# Altium PCB 5x5LED_REV_A.PcbDoc
Units mm, origin at the board's own origin, x right, y up, seen from the top; angles counter-clockwise.
Board outline 63 x 41 mm, 4 copper layers (Top Layer, L2 (GND), L3 (GND), Bottom Layer), stack 1.369 mm thick; 49 components, 29 nets, 153 pads, 48 vias.
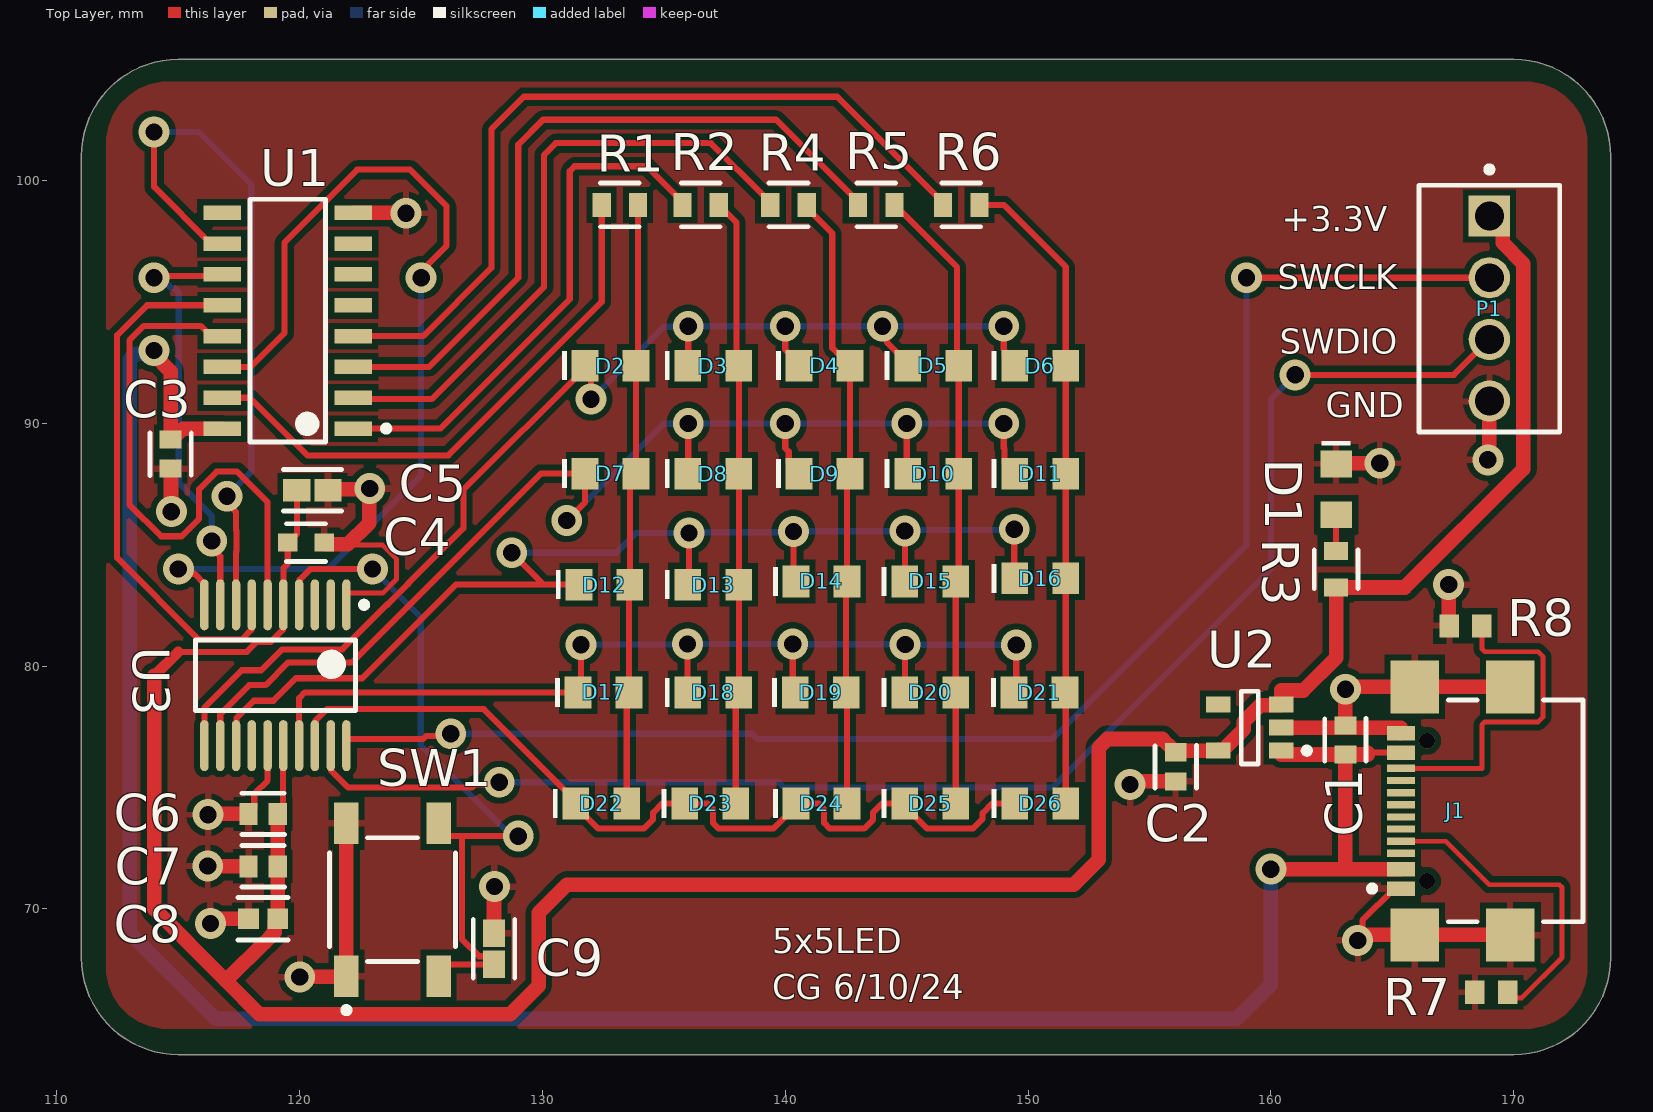
[diagram p0: Top Layer view]
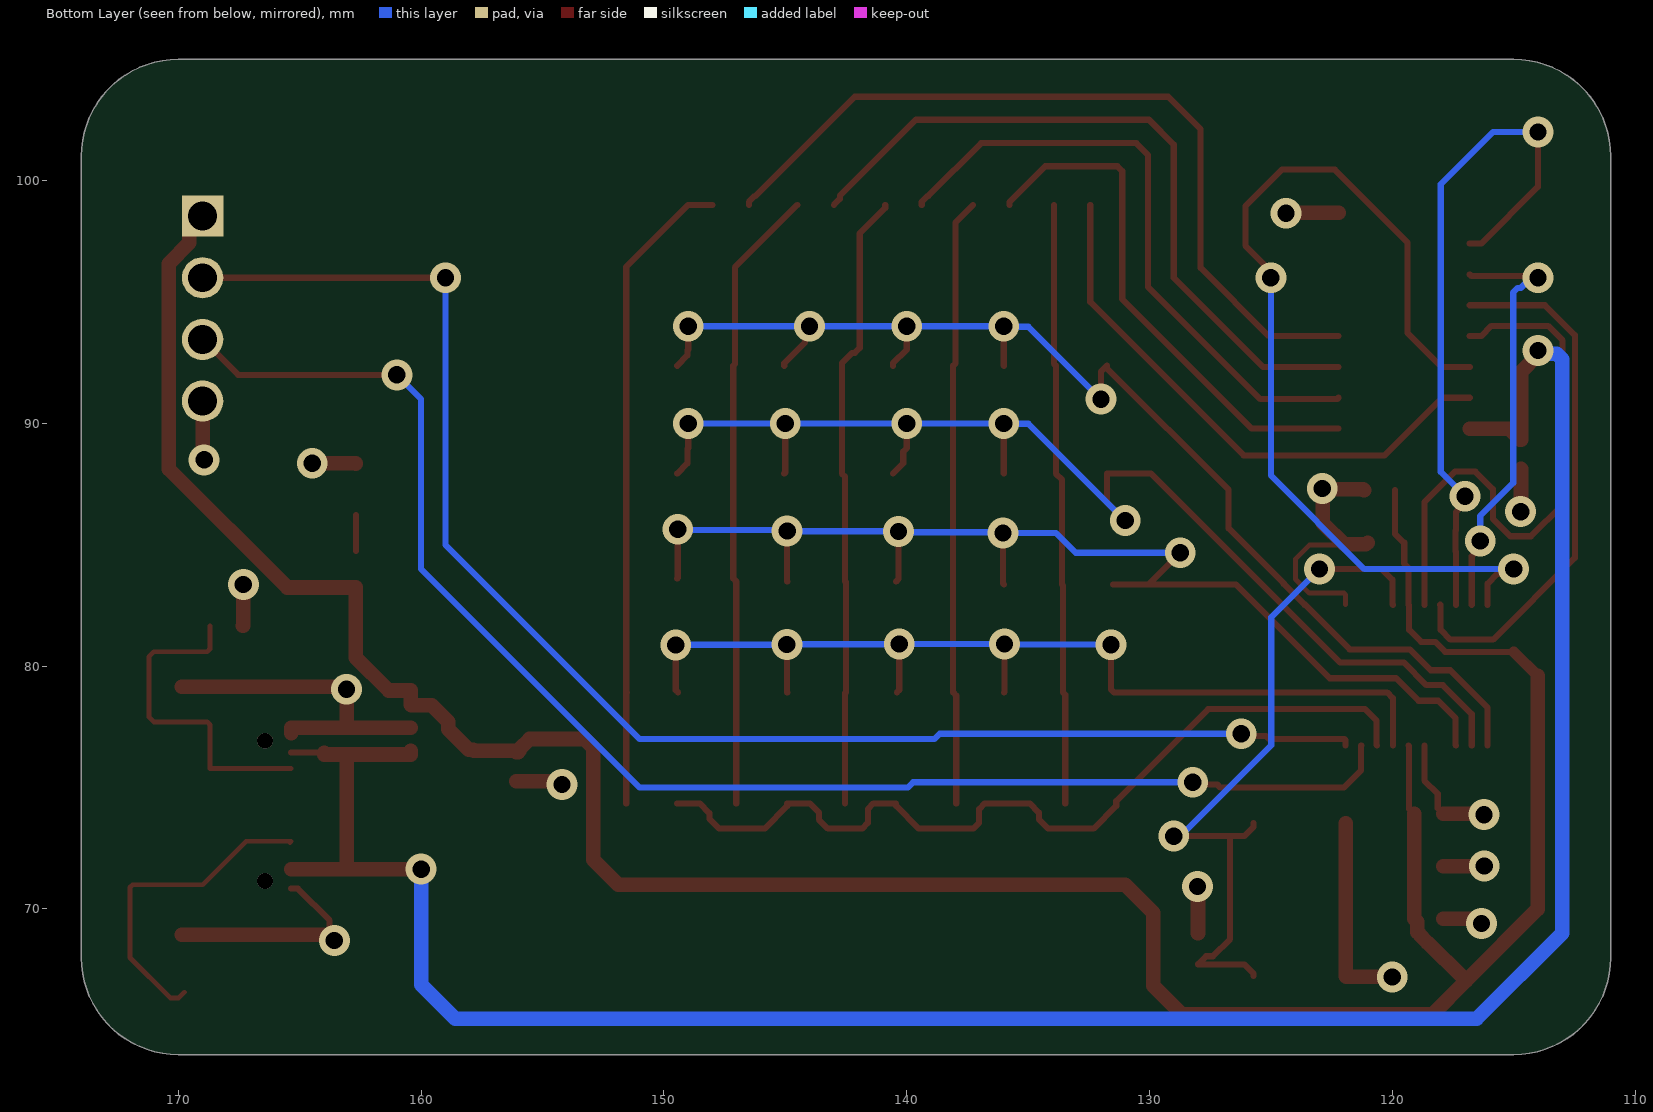
[diagram p1: Bottom Layer view, seen from below]
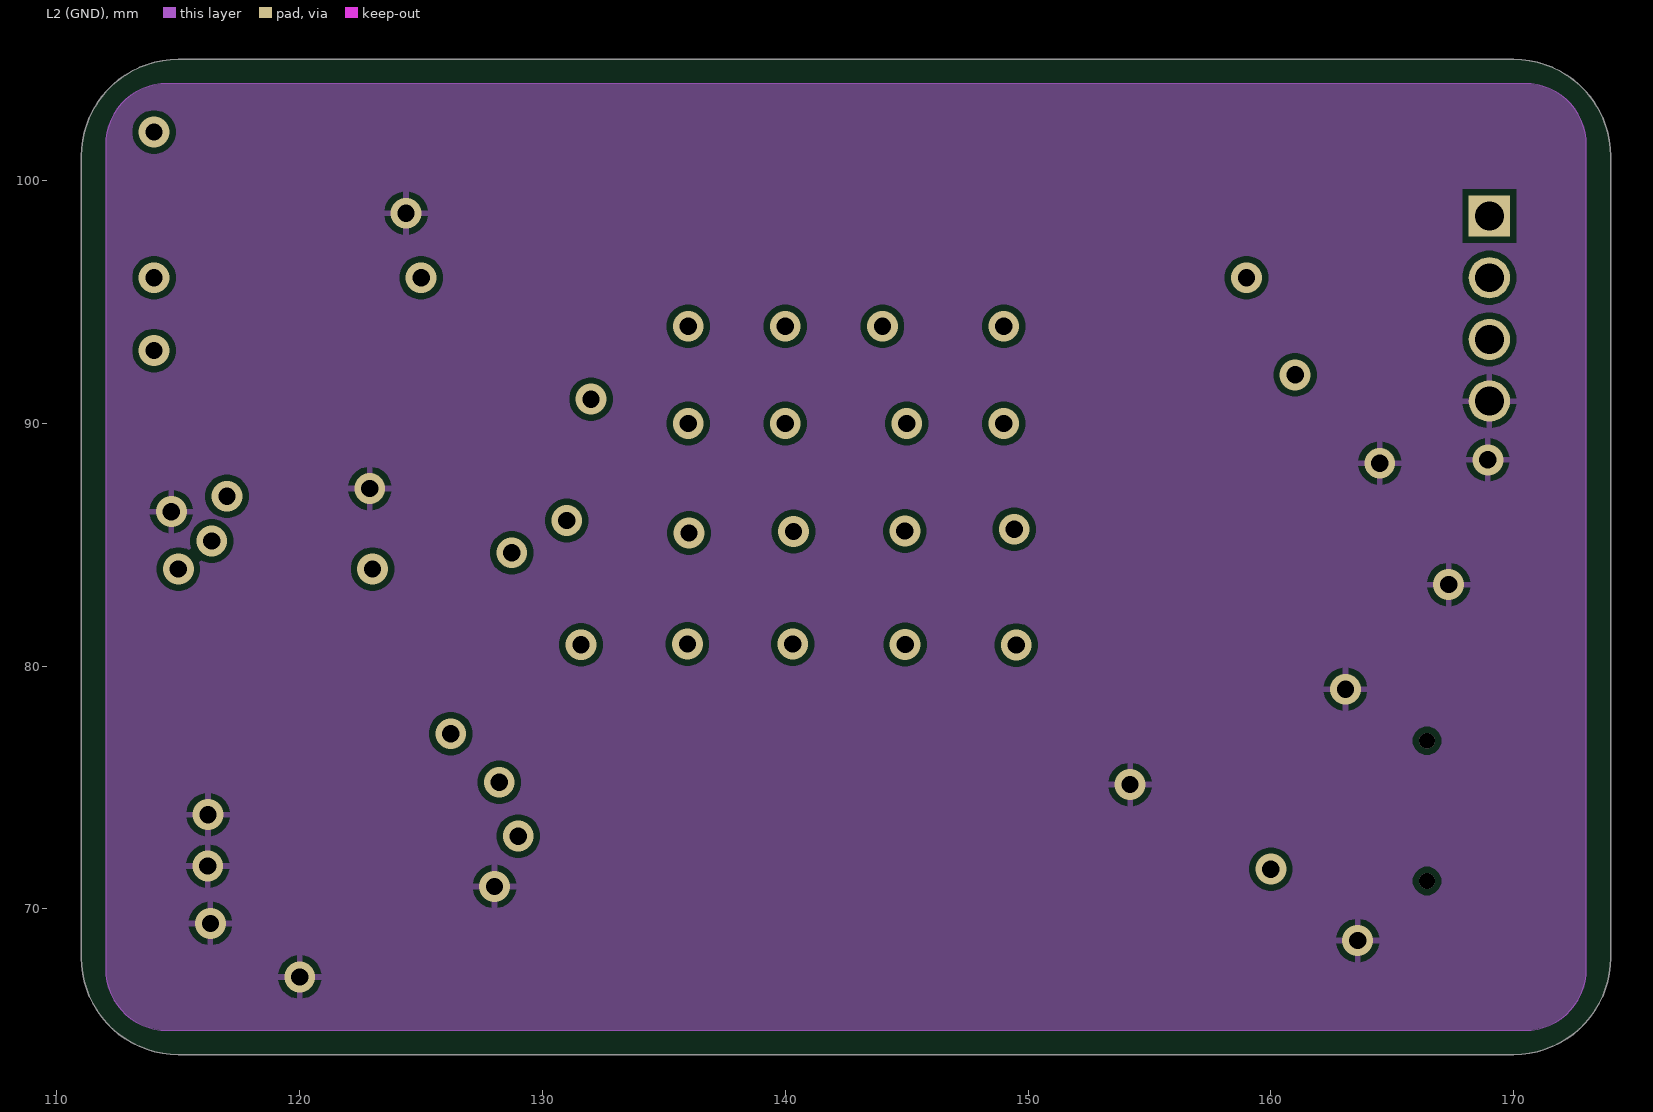
[diagram p2: L2 (GND)]
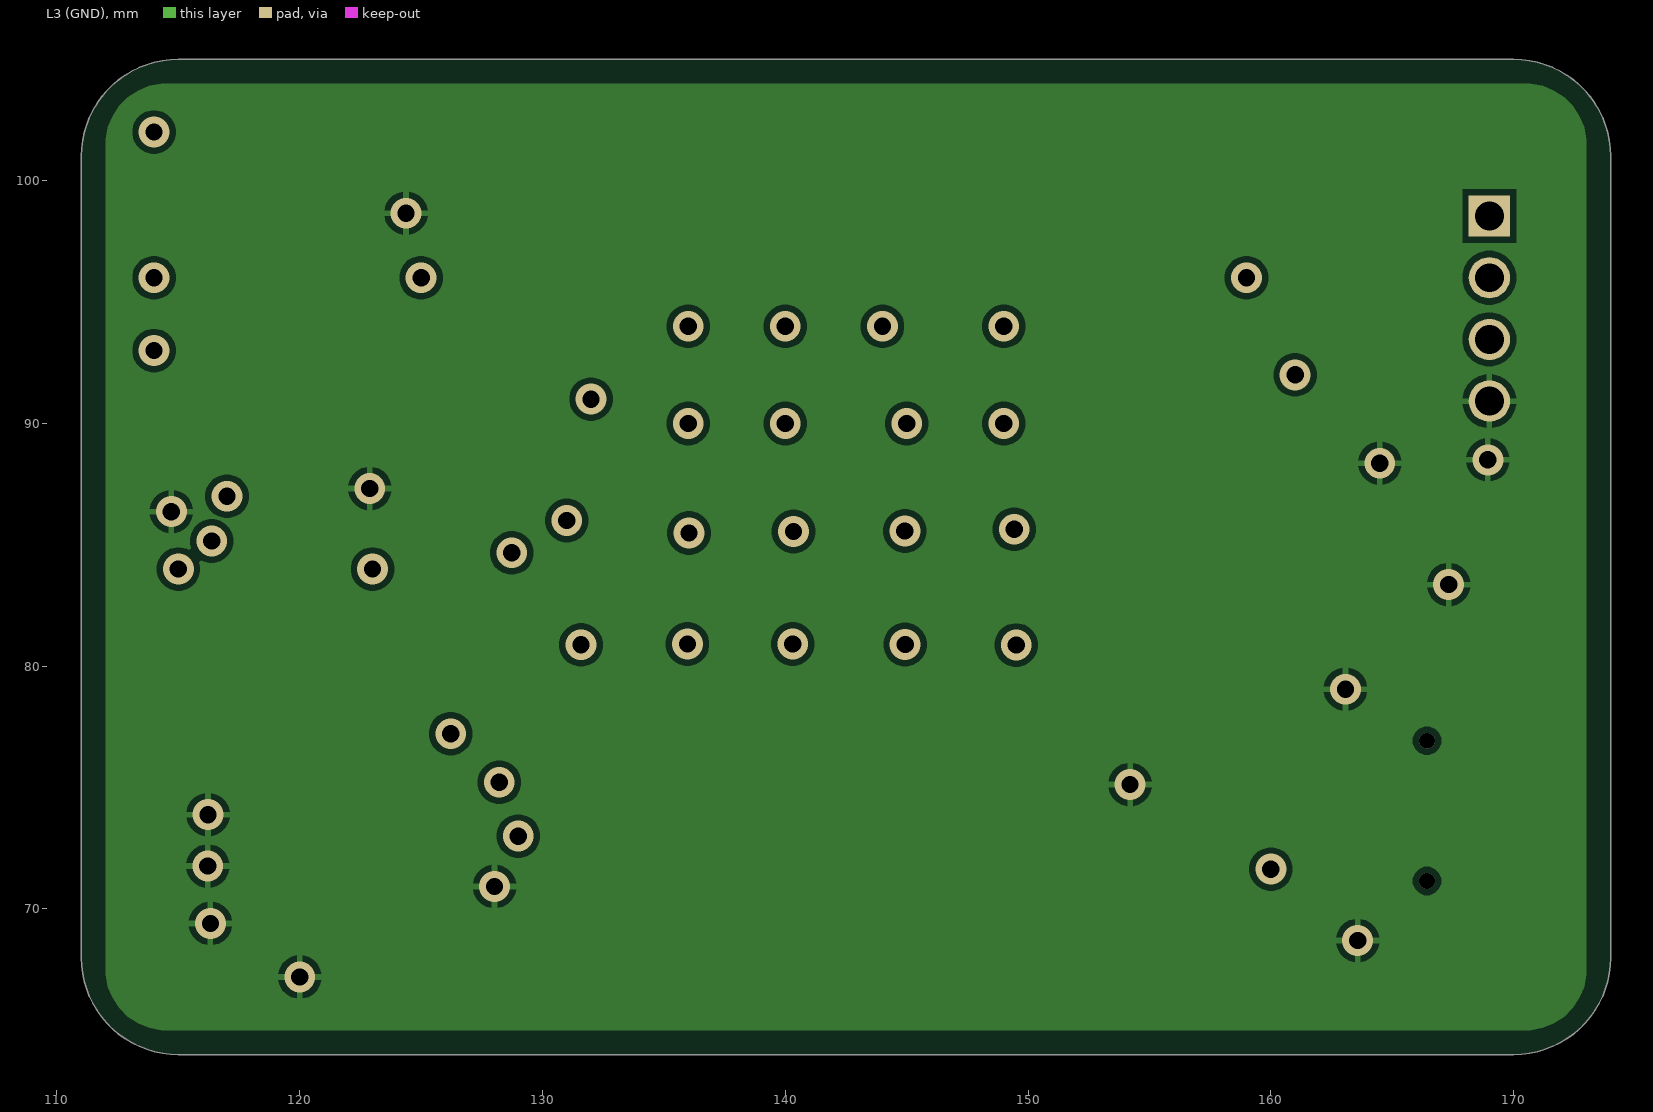
[diagram p3: L3 (GND)]
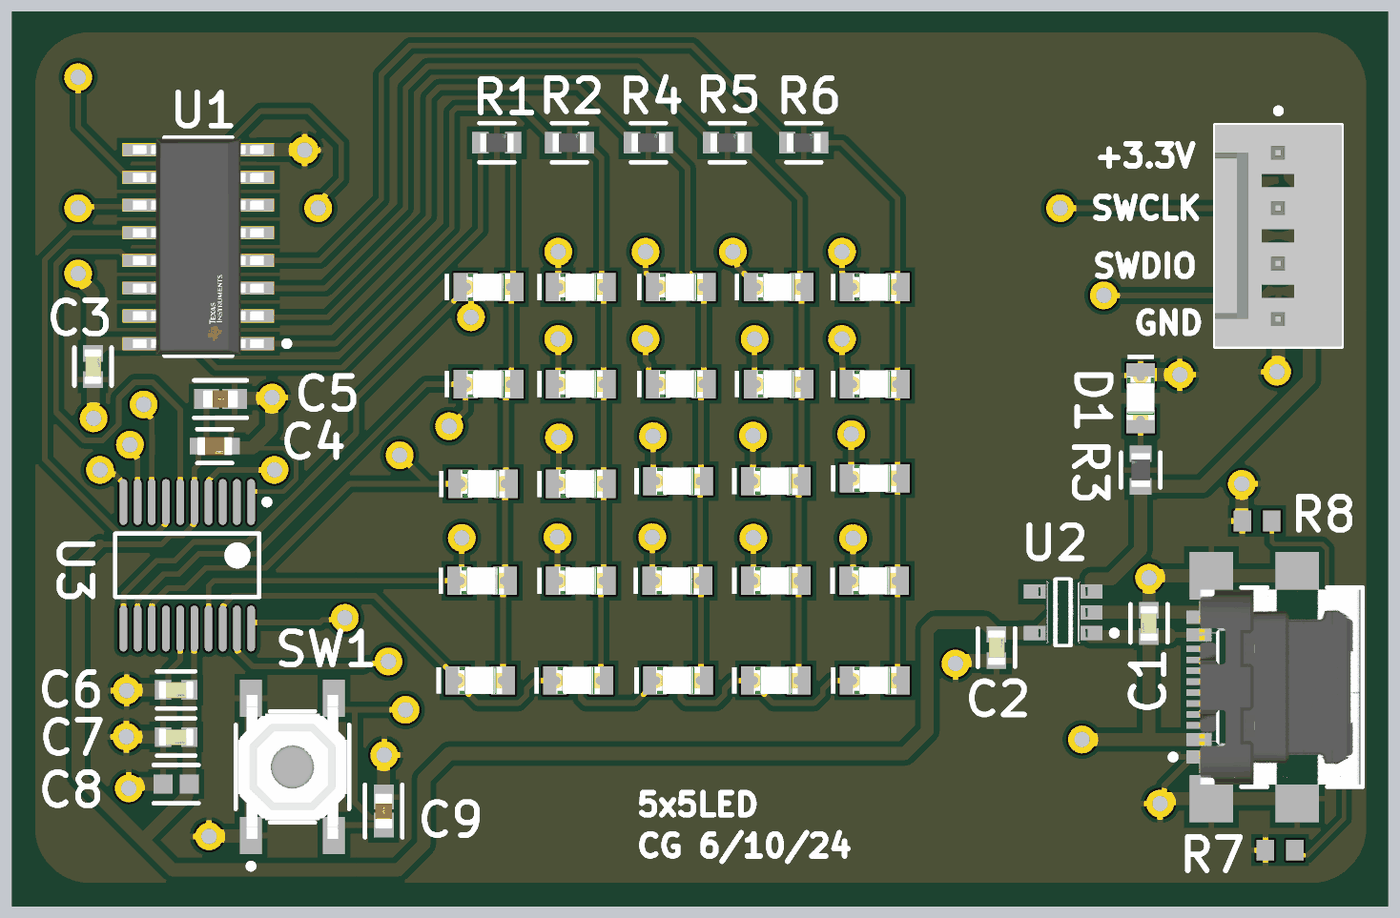
[diagram p4: 3D render of the assembled board from above, using the file's embedded part models]

## Layer stack, top to bottom
Top Solder: solder mask 0.0254, SM-001, Dk 4
Top Layer: signal copper 0.035
Dielectric 1: prepreg 0.1295, PP-017, Dk 4.3
Dielectric 2: prepreg 0.1295, PP-017, Dk 4.3
L2 (GND): signal copper 0.035
Dielectric 3: core 0.7112, Core-039, Dk 4.8
L3 (GND): signal copper 0.035
Dielectric 4: prepreg 0.1295, PP-017, Dk 4.3
Dielectric 5: prepreg 0.1295, PP-017, Dk 4.3
Bottom Layer: signal copper 0.035
Bottom Solder: solder mask 0.0254, SM-001, Dk 4

## Board outline
111,68 111,101 cw(c115,101) 115,105 170,105 cw(c170,101) 174,101 174,68 cw(c170,68) 170,64 115,64 cw(c115,68)

## Design rules (kind name [scope] priority, off if disabled: settings)
Clearance Clearance_1 [(ExistsOnLayer('L2 (GND)') Or ExistsOnLayer('L3 (GND)')) vs (ExistsOnLayer('L2 (GND)') Or ExistsOnLayer('L3 (GND)'))] p1: gap=0.254 ignorepadtopadclearanceinfootprint=FALSE sourcerule=37 cellrowname=All cellrowtype=0 cellcolname=All cellcoltype=0 innerlayers=TRUE
Clearance Clearance_2 [(ExistsOnLayer('Top Layer') Or ExistsOnLayer('Bottom Layer')) vs (ExistsOnLayer('Top Layer') Or ExistsOnLayer('Bottom Layer'))] p2: gap=0.254 ignorepadtopadclearanceinfootprint=FALSE sourcerule=37 cellrowname=All cellrowtype=0 cellcolname=All cellcoltype=0 outerlayers=TRUE
Clearance [All] p3: gap=0.254 ignorepadtopadclearanceinfootprint=FALSE ismatrix=TRUE
PolygonConnect [All] p1: connectstyle=Relief reliefconductorwidth=0.254 reliefentries=4 polygonreliefangle="90 Angle" airgapwidth=0.254
RoutingVias [All] p1: holewidth=0.711 width=1.27 viastyle="Through Hole" minholewidth=0.711 minwidth=1.27 maxholewidth=0.711 maxwidth=1.27
SolderMaskExpansion [All] p1: expansion=0.102 istentingtop=FALSE
UnRoutedNet [All] p1: checkbadconnections=TRUE
Width MaxMinWidth_1 [All] p1: maxlimit=0.6 minlimit=0.2 preferedwidth=0.254 minimp=50.000000 maximp=50.000000 favimp=50.000000
Width [All] p2: maxlimit=0.254 minlimit=0.254 preferedwidth=0.254
29 further rules are at their usual default settings.

## Components (designator, comment, footprint, x,y, rotation, side; value= is the part's Value field where it differs from the comment)
C1 "100n" FP-C0603C-CF-MFG 163.068,76.962 r90 top value="0.10 μF"
C2 "100n" FP-C0603C-CF-MFG 156.083,75.854 r270 top value="0.10 μF"
C3 "100n" FP-C0603C-CF-MFG 114.681,88.738 r270 top value="0.10 μF"
C4 "10n" FP-0603-L_1_6_0_15-W_0_81-MFG 120.257,85.09 r0 top
C5 "1u" FP-C1608-080-0_1-IPC_B 120.523,87.249 r180 top
C6 "100n" FP-C0603C-CF-MFG 118.491,73.914 r180 top value="0.10 μF"
C7 "100n" FP-C0603C-CF-MFG 118.491,71.755 r180 top value="0.10 μF"
C8 "4u7" FP-GRM188-0_15-IPC_C 118.491,69.596 r180 top
C9 "1u" FP-C1608-080-0_1-IPC_B 128,68.359 r270 top
D1 "150080RS75000" WL-SMCW_0805_150080xx75000 162.687,87.283 r270 top
D2 "150080RS75000" WL-SMCW_0805_150080xx75000 132.802,92.379 r0 top
D3 "150080RS75000" WL-SMCW_0805_150080xx75000 137.036,92.379 r0 top
D4 "150080RS75000" WL-SMCW_0805_150080xx75000 141.616,92.379 r0 top
D5 "150080RS75000" WL-SMCW_0805_150080xx75000 146.096,92.379 r0 top
D6 "150080RS75000" WL-SMCW_0805_150080xx75000 150.503,92.379 r0 top
D7 "150080RS75000" WL-SMCW_0805_150080xx75000 132.802,87.934 r0 top
D8 "150080RS75000" WL-SMCW_0805_150080xx75000 137.036,87.934 r0 top
D9 "150080RS75000" WL-SMCW_0805_150080xx75000 141.616,87.934 r0 top
D10 "150080RS75000" WL-SMCW_0805_150080xx75000 146.096,87.934 r0 top
D11 "150080RS75000" WL-SMCW_0805_150080xx75000 150.503,87.934 r0 top
D12 "150080RS75000" WL-SMCW_0805_150080xx75000 132.548,83.362 r0 top
D13 "150080RS75000" WL-SMCW_0805_150080xx75000 137.036,83.362 r0 top
D14 "150080RS75000" WL-SMCW_0805_150080xx75000 141.489,83.489 r0 top
D15 "150080RS75000" WL-SMCW_0805_150080xx75000 145.969,83.489 r0 top
D16 "150080RS75000" WL-SMCW_0805_150080xx75000 150.503,83.616 r0 top
D17 "150080RS75000" WL-SMCW_0805_150080xx75000 132.514,78.917 r0 top
D18 "150080RS75000" WL-SMCW_0805_150080xx75000 137.036,78.917 r0 top
D19 "150080RS75000" WL-SMCW_0805_150080xx75000 141.455,78.917 r0 top
D20 "150080RS75000" WL-SMCW_0805_150080xx75000 145.969,78.917 r0 top
D21 "150080RS75000" WL-SMCW_0805_150080xx75000 150.469,78.917 r0 top
D22 "150080RS75000" WL-SMCW_0805_150080xx75000 132.421,74.345 r0 top
D23 "150080RS75000" WL-SMCW_0805_150080xx75000 136.909,74.345 r0 top
D24 "150080RS75000" WL-SMCW_0805_150080xx75000 141.489,74.345 r0 top
D25 "150080RS75000" WL-SMCW_0805_150080xx75000 145.969,74.345 r0 top
D26 "150080RS75000" WL-SMCW_0805_150080xx75000 150.503,74.345 r0 top
J1 "USB4110-GF-A" FP-USB4110-GF-A-MFG 169.037,74.041 r90 top
P1 "22-27-2041" MOLX-22-27-2041_V 169,94.73 r90 top
R1 "220R" FP-CRCW0603-e3-MFG 133.186,99 r0 top
R2 "220R" FP-CRCW0603-e3-MFG 136.512,99 r0 top
R3 "220R" FP-CRCW0603-e3-MFG 162.687,83.993 r90 top
R4 "220R" FP-CRCW0603-e3-MFG 140.131,99 r0 top
R5 "220R" FP-CRCW0603-e3-MFG 143.75,99 r0 top
R6 "220R" FP-CRCW0603-e3-MFG 147.25,99 r0 top
R7 "5k1R" RESC1608X55X30NL15T15 169.079,66.569 r0 top
R8 "5k1R" RESC1608X55X30NL15T15 168.021,81.661 r0 top
SW1 "8-1437565-1" FP-8-1437565-1-MFG 123.82,70.383 r90 top
U1 "SN74HC595DR" FP-D0016A-MFG 119.507,94.234 r180 top
U2 "MIC5317-3.3YM5-TR" FP-SOT23-5LD-PL-1-MFG 159.131,77.47 r180 top
U3 "STM32F030F4P6TR" STM-TSSOP20_M 118.999,79.629 r270 top

## Footprints (in the part's own frame and the unit in brackets; to place one, negate y for a bottom-side part, rotate by r counter-clockwise, add the part's x,y. Pads: shape width x height; smd on the part's side, far side on the other; paste and mask are expansions set on the pad)
FP-8-1437565-1-MFG [mm]
  rect 1.7x1 smd paste+0 mask+0: 1(-3.15,1.9) 2(3.15,1.9) 3(-3.15,-1.9) 4(3.15,-1.9)
  silkscreen extent -4.67,-2.6 2.55,2.6, body extent -4.1,-2.7 4.1,2.7, height 0.25
FP-0603-L_1_6_0_15-W_0_81-MFG [mm]
  rect 0.8x0.75 smd paste+0 mask+0: 1(-0.75,0) 2(0.75,0)
  silkscreen extent -0.8,-0.77 0.8,0.77, body extent -1.25,-0.58 1.25,0.58, height 0.25
FP-C0603C-CF-MFG [mm]
  rect 0.75x0.9 smd paste+0 mask+0: 1(-0.6,0) 2(0.6,0)
  silkscreen extent -0.87,-0.85 0.88,0.85, body extent -1.2,-0.6 1.2,0.6, height 0.25
FP-C1608-080-0_1-IPC_B [mm]
  rect 1.131x0.912 smd paste+0 mask+0: 1(-0.641,0) 2(0.641,0)
  silkscreen extent -1.21,-0.86 1.21,0.86, body extent -1.46,-0.71 1.46,0.71, height 0.25
FP-CRCW0603-e3-MFG [mm]
  rect 0.75x1 smd paste+0 mask+0: 1(-0.75,0) 2(0.75,0)
  silkscreen extent -0.8,-0.9 0.8,0.9, body extent -1.22,-0.6 1.22,0.6, height 0.25
FP-D0016A-MFG [mm]
  rect 1.55x0.6 smd paste-1000 mask+0: 1(-2.7,4.445) 2(-2.7,3.175) 3(-2.7,1.905) 4(-2.7,0.635) 5(-2.7,-0.635) 6(-2.7,-1.905) 7(-2.7,-3.175) 8(-2.7,-4.445) 9(2.7,-4.445) 10(2.7,-3.175) 11(2.7,-1.905) 12(2.7,-0.635) 13(2.7,0.635) 14(2.7,1.905) 15(2.7,3.175) 16(2.7,4.445)
  silkscreen extent -4.18,-5 1.55,5, body extent -3.57,-5.25 3.57,5.25, height 0.25
FP-GRM188-0_15-IPC_C [mm]
  rect 0.856x0.858 smd paste+0 mask+0: 1(-0.601,0) 2(0.601,0)
  silkscreen extent -1.03,-0.87 1.03,0.87
FP-SOT23-5LD-PL-1-MFG [mm]
  rect 1x0.66 smd paste+0 mask+0: 1(-1.3,0.95) 2(-1.3,0) 3(-1.3,-0.95) 4(1.3,-0.95) 5(1.3,0.95)
  silkscreen extent -2.48,-1.5 0.35,1.5, body extent -1.9,-1.6 1.9,1.6, height 0.25
FP-USB4110-GF-A-MFG [mm]
  rect 2.18x2 smd paste+0 mask+0: 1(-5.11,3.105) 2(5.11,3.105) 3(-5.11,-0.825) 4(5.11,-0.825)
  rect 0.6x1.15 smd paste+0 mask+0: A1-B12(-3.2,3.68) A4-B9(-2.4,3.68) B1-A12(3.2,3.68) B4-A9(2.4,3.68)
  rect 0.3x1.15 smd paste+0 mask+0: A5(-1.25,3.68) A6(-0.25,3.68) A7(0.25,3.68) A8(1.25,3.68) B5(1.75,3.68) B6(0.75,3.68) B7(-0.75,3.68) B8(-1.75,3.68)
  round 0.65 hole 0.65 unplated paste-2539.97 mask+0: ""(-2.89,2.605) ""(2.89,2.605)
  silkscreen extent -4.57,-3.83 4.57,4.99, body extent -6.3,-3.92 6.3,4.36, height 0.25
MOLX-22-27-2041_V [mm] "CONN, 4-Leads, Body 10.16x5.8mm, Pitch 2.54mm"
  rect 1.7x1.7 hole 1.19: 1(3.81,0)
  round 1.7 hole 1.19: 2(1.27,0) 3(-1.27,0) 4(-3.81,0)
  silkscreen extent -5.08,-2.9 5.85,2.9, body extent -5.08,-2.9 5.08,2.9, height 11.7
RESC1608X55X30NL15T15 [mm] "Chip Resistor, 2-Leads, Body 1.60x0.80mm, IPC Medium Density"
  rect 0.8x0.95 smd: 1(-0.675,0) 2(0.675,0)
  body extent -0.87,-0.48 0.87,0.48, height 0.55
STM-TSSOP20_M [mm] "SOP, 20-Leads, Body 6.6x4.5mm, Pitch 0.65mm, IPC Low Density"
  oval 2.1x0.35 smd: 1(-2.9,2.925) 2(-2.9,2.275) 3(-2.9,1.625) 4(-2.9,0.975) 5(-2.9,0.325) 6(-2.9,-0.325) 7(-2.9,-0.975) 8(-2.9,-1.625) 9(-2.9,-2.275) 10(-2.9,-2.925) 11(2.9,-2.925) 12(2.9,-2.275) 13(2.9,-1.625) 14(2.9,-0.975) 15(2.9,-0.325) 16(2.9,0.325) 17(2.9,0.975) 18(2.9,1.625) 19(2.9,2.275) 20(2.9,2.925)
  silkscreen extent -3.02,-3.3 1.45,3.78, body extent -2.25,-3.3 2.25,3.3, height 1.2
WL-SMCW_0805_150080xx75000 [mm] "SMD Mono-color Chip LED, body 2.0x1.25mm"
  rect 1.1x1.3 smd: 1(-1.05,0) 2(1.05,0)
  silkscreen extent -2,-0.6 -1.8,0.6, body extent -1,-0.63 1,0.62, height 0.7

## Part data
C1 C2 C3 C6 C7: library part CMP-2006-03061-2, "CAP CER 0.1UF 50V X7R 0603", Capacitance="0.10 μF", Manufacturer=KEMET, Manufacturer Part Number=C0603C104K5RACTU, Package=C0603C-CF, Temperature="-55°C to +125°C", Temperature Characteristic=X7R, Temperature Coefficient=30ppm/°C, Temperature Range High=+125°C, Temperature Range Low=-55°C, Tolerance=0.1, Voltage rating="50 V", Automotive=Yes, Automotive Grade="Grade 1", Category=Cap, ComponentLink2Description=Datasheet, ComponentLink2URL=https://api.kemet.com/component-edge/download/datasheet/C0603C100J5GACAUTO.pdf, Device Class L1="Passive Components", Device Class L2=Capacitors, Device Class L3="Ceramic Capacitors", Digikey Description="CAP CER 0.1UF 50V X7R 0603", Height=0.87mm, Lead Free=Yes, Material=Ceramic, Octopart=https://octopart.com/c0603c104k5ractu-kemet-139244, RoHS=TRUE
C4: library part CMP-2006-04374-2, "General Purpose Ceramic Capacitor, 0603, 10nF, 10%, X7R, 15%, 50V", Capacitance=10nF, Case Code (Imperial)=0603, Case Code (Metric)=1608, Dielectric=X7R, Dielectric Material=Ceramic, Insulation Resistance=100GR, Max Operating Temperature=125°C, Min Operating Temperature=-55°C, Package Quantity=1, Tolerance=10%, Voltage=50V, Case/Package=0603, Contact Plating=Tin, Depth=0.81mm, Dissipation Factor=2.5%, Height=0.9mm, Lead Free="Lead Free", Length=1.6mm, Mount="Surface Mount", Number of Pins=2, Packaging="Tape and Reel", Radiation Hardening=No, REACH SVHC="No SVHC", Termination=SMD/SMT, Thickness=0.035inch, Voltage rating=50V, Voltage Rating (DC)=50V, Width=0.032inch
C5 C9: library part CMP-2000-06025-2, "Multilayer Ceramic Capacitors 1μF ±10% 50V X5R SMD 0603", Capacitance=1uF, Case Code (Imperial)=0603, Case Code (Metric)=1608, Dielectric=X5R, Dielectric Material=Ceramic, Max Operating Temperature=85°C, Min Operating Temperature=-55°C, Package Quantity=1, Tolerance=10%, Voltage=50V, Case/Package=0603, Construction=Flat, Depth=0.8mm, Height=0.8mm, Lead Free="Lead Free", Length=1.6mm, Mount="Surface Mount", Number of Pins=2, Packaging="Tape and Reel", Radiation Hardening=No, REACH SVHC="No SVHC", Resistor Type=Ceramic, RoHS Compliant=Yes, Series=C, Termination=SMD/SMT, Thickness=0.035inch, Voltage rating=50V, Voltage Rating (DC)=50V, Weight=7.1E-05oz, Width=0.031inch
C8: library part CMP-2006-02523-2, "Chip Multilayer Ceramic Capacitors for General Purpose, 0603, 4.7uF, X5R, 15%, 10%, 25V", Capacitance=4.7uF, Case Code (Imperial)=0603, Case Code (Metric)=1608, Dielectric=X5R, Max Operating Temperature=85°C, Min Operating Temperature=-55°C, Package Quantity=4000, Tolerance=10%, Voltage=25V, Case/Package=0603, Depth=0.8mm, Height=0.8mm, Lead Free="Lead Free", Length=1.6mm, Material=Ceramic, Mount="Surface Mount", Packaging="Cut Tape", REACH SVHC="No SVHC", Thickness=0.031inch, Voltage rating=25V, Voltage Rating (DC)=25V, Width=0.031inch
D1 D2 D3 D4 D5 D6 D7 D8 D9 D10 D11 D12 D13 D14 D15 D16 D17 D18 D19 D20 D21 D22 D23 D24 D25 D26: library part CMP-1426-00011-2, Case Code (Imperial)=0805, Case Code (Metric)=2012, Color=Red, Forward Current=100mA, Forward Voltage=2V, Max Operating Temperature=85°C, Max Reverse Voltage (DC)=5V, Min Operating Temperature=-40°C, Test Current=20mA, Case/Package=0805, Dominant Wavelength=625nm, Height=700µm, Length=2mm, Lens Style="Clear, Rectangular", Luminous Intensity=150mcd, Mount="Surface Mount", NexarPartId=29717781, Packaging="Tape and Reel", Peak Wavelength=630nm, REACH SVHC=Unknown, RoHS=Compliant, Viewing Angle=140°, Wavelength=625nm, Width=1.25mm
J1: library part CMP-245163-000002-1, "CONN USB 2.0 TYPE-C R/A SMT", Current rating=3/4.25/1.25/0.25A, Manufacturer=GCT, Package=0, Temperature="-40°C to +85°C", Temperature Range High=+85°C, Temperature Range Low=-40°C, Voltage rating=20V, Automotive=No, Category=Conn, ComponentLink2Description=Datasheet, ComponentLink2URL=https://gct.co/files/drawings/usb4110.pdf, Conn Orientation="Right Angle", Contact material=Gold,Nickel, Device Class L1=Connectors, Device Class L2="USB Connectors", Device Class L3=unset, Digikey Description="CONN USB 2.0 TYPE-C R/A SMT", Height=3.46mm, Is Female=yes, Lead Free=Yes, Manufacturer Part Number=USB4110-GF-A, Number Of Contacts=16, Octopart=https://octopart.com/usb4110-gf-a-gct-103941985, RoHS=TRUE, Shielding=true, Standoff Height=0.1mm, Usb Standard="USB 2.0"
P1: library part CMP-2000-05243-1, "Male Header, Pitch 2.54 mm, 1 x 4 Position, Height 11.7 mm, Tail Length 3.56 mm, RoHS, Bulk", Current rating=4A, Manufacturer=Molex, Operating temperature=0degCto+75degC, Voltage rating=250V, Contact material=Tinplatedbrass, Datasheet URL=http://www.molex.com/pdm_docs/sd/022272041_sd.pdf, Datasheet Version="Rev. F, 06/2009", Housing material=Nylon(UL94V-0), Manufacturer URL=http://www.molex.com/
R1 R2 R3 R4 R5 R6: library part CMP-2000-03085-2, "RES Thick Film, 220Ω, 1%, 0.1W, 100ppm/°C, 0603", Case Code (Imperial)=0603, Case Code (Metric)=1608, Max Operating Temperature=155°C, Max Power Dissipation=100mW, Min Operating Temperature=-55°C, Package Quantity=10, Temperature Coefficient=100ppm/°C, Tolerance=1%, Voltage rating=75V, Case/Package=0603, Composition="Thick Film", Contact Plating=Tin, Depth=0.85mm, Features="Automotive AEC-Q200", Height=0.45mm, Lead Free="Lead Free", Length=1.55mm, Military Standard=Not, Number of Terminations=2, Packaging="Tape and Reel", Power Rating=100mW, Radiation Hardening=No, Resistance=220R, Termination=SMD/SMT, Voltage Rating (DC)=75V, Weight=7.1E-05oz, Width=0.033inch
R7 R8: library part CMP-2000-00539-1, Manufacturer=Panasonic, Part Number=ERJ3EKF5100V
SW1: library part CMP-03407-000016-1, "SWITCH TACTILE SPST-NO 0.02A 15V", Case/Package=SMD/SMT, Contact Current Rating=20mA, Contact Resistance=100mR, Max Operating Temperature=85°C, Max Voltage Rating (DC)=15V, Min Operating Temperature=-35°C, Operating Force=1.57N, Package Quantity=4000, Actuator Length=0.4mm, Actuator Material=Brass, Actuator Type=Standard, Contact material="Copper Alloy", Contact Plating=Silver, Electrical Life=500000Cycles, ELV=Compliant, Illumination Type=Non-Illuminated, Max Current Rating=20mA, Mechanical Life=500000Cycles, Mount="Surface Mount", Orientation=Straight, Packaging="Tape and Reel", Radiation Hardening=No, RoHS Compliant=Yes, Series=FSMCT, Switch Function=Off-Mom, Switch Travel=0.25mm, Termination="Gull Wing", Throw Configuration=SPST, Type=Switch, Voltage Rating (DC)=15V
U1: library part CMP-0780-00037-4, "IC 8BIT SHIFT REG 3ST-OUT 16SOIC", Ambient Temperature Range High=+85°C, Ambient Temperature Range Low=-40°C, Frequency=29MHz, Manufacturer="Texas Instruments", Max Junction Temp=+150°C, Max Supply Voltage=6V, Min Supply Voltage=2V, Nominal Supply Current=80uA, Package=D0016A, Temperature="-40°C to +85°C", Automotive=No, Category=IC, ComponentLink2Description=Datasheet, ComponentLink2URL=http://www.ti.com/lit/ds/symlink/sn74hc595.pdf, Device Class L1="Integrated Circuits (ICs)", Device Class L2="Logic ICs", Device Class L3="Shift Registers", Digikey Description="IC 8BIT SHIFT REG 3ST-OUT 16SOIC", Height=1.75mm, Ipc Land Pattern Name=SOIC127P600X175-16, Lead Free=Yes, Manufacturer Part Number=SN74HC595DR, Mouser Description="Counter Shift Registers 8bit Shift", Number of Circuits=1, Number Of Inputs=1, Number Of Outputs=9, Octopart=https://octopart.com/sn74hc595dr-texas+instruments-500634, Propagation Delay=43ns, RoHS=TRUE, Standoff Height=0.1mm, Temperature Range High=+85°C, Temperature Range Low=-40°C
U2: library part CMP-06324-000116-1, "IC REG LINEAR 3.3V 150MA SOT23-5", Case/Package=SOT-23-5, Dropout Voltage=155mV, Max Input Voltage=6V, Max Operating Temperature=125°C, Min Current Limit=200mA, Min Input Voltage=2.5V, Min Operating Temperature=-40°C, Output Current=150mA, Output Voltage=3.3V, Package Quantity=3000, Power Supply Rejection Ratio (PSRR)=70dB, Mount="Surface Mount", Number Of Outputs=1, Number of Regulators=1, Packaging="Tape and Reel", RoHS Compliant=No, Series=-
U3: library part CMP-0304-00066-2, "ARM Cortex-M0 32-bit MCU, 16 KB Flash, 4 KB Internal RAM, 15 I/Os, 20-Pin TSSOP, -40 to 85 degC, Tape and Reel", I/Os (High Current)=15, Manufacturer=STMicroelectronics, Operating Frequency(F) (Processor speed) (MHz)=48, Package Description="20-Pin Thin Shrink Small Outline Package, Body 6.5 x 4.4 mm, Pitch 0.65 mm", Package Reference=TSSOP20, Supply Voltage(Vcc) min (V)=2.4, ComponentLink1Description="Manufacturer URL", ComponentLink1URL=http://www.st.com/, ComponentLink2Description=Datasheet, ComponentLink2URL=http://www.st.com/st-web-ui/static/active/en/resource/technical/document/datasheet/DM00088500.pdf, Core="ARM Cortex-M0", DatasheetVersion="Rev. 2", FLASH Size (Prog) (kB)=16, Internal RAM Size (kB)=4, Mounting Technology="Surface Mount", Packing="Tape and Reel", PartNumber=STM32F030F4P6TR

## Via types
v1: diameter 1.27, hole 0.711, Top Layer to Bottom Layer, 48 vias

## Nets (pads, with @x,y where several pads share a name; then routed paths per layer and width w, separated by ;. In a path a pad name is that pad's centre, name@x,y a point inside that pad or via, vN(x,y) a via of type N, cw(c..) or ccw(c..) an arc to the next point about the centre after c; other vN are vias at no path point)
+3V3: C2.1 C4.1 C5.2 C6.1 C7.1 C8.1 P1.1 R3.1 U2.3 U2.5 U3.5 U3.16 | length 117.9
  Top Layer w0.254: 114.994,80.59 117.815,80.59 118.225,81 118.806,81 119.306,81.499 119.306,82.511 U3.5 119.324,84.044 119.507,84.227 C4.1 119.532,85.09 119.882,85.44 C5.2 ; C6.1 119.306,74.129 119.306,76.711 U3.16
  Top Layer w0.45: 114,79.596 114.994,80.59
  Top Layer w0.6: 114,79.596 114,70 116.962,67.038 118.332,65.668 128.668,65.668 129.843,66.843 129.843,69.843 131,71 151.879,71 152.91,72.032 152.91,76.649 153.262,77 155.537,77 155.933,76.604 155.933,76.529 156.008,76.454 C2.1 156.083,76.52 U2.5 157.861,76.55 158.031,76.55 158.884,77.403 158.884,77.716 159.558,78.39 160.401,78.39 U2.3 160.431,79 161.338,79 162.687,80.349 R3.1 165.524,83.243 170.404,88.123 170.404,96.582 169.55,97.436 169.55,97.99 P1.1 ; 117.083,67.159 118.536,68.613 118.548,68.613 118.872,68.937 118.872,68.949 118.964,69.04 118.964,69.468 C8.1 C7.1 ; C7.1 C6.1
+5V: C1.1 C3.1 J1.A4-B9 J1.B4-A9 U1.16 U2.1 | length 100.1
  Top Layer w0.254: 164,76.441 J1.B4-A9
  Top Layer w0.6: v1(114,93) 114,92.819 114.681,92.138 C3.1 114.756,89.338 114.831,89.413 114.831,89.438 115.182,89.789 U1.16 ; v1(160,71.641) 163.068,71.641 ; U2.1 160.431,76.362 C1.1 ; 164,76.441 164,76.362 C1.1 ; J1.A4-B9 163.068,71.641 ; 163.068,71.641 C1.1
  Bottom Layer w0.6: v1(114,93) 113.872,92.872 113.223,92.872 113,92.649 113,69 116.528,65.472 158.6,65.472 160,66.872 v1(160,71.641)
COL_1_ANODE: D2.1 D3.1 D4.1 D5.1 D6.1 U3.11 | length 51.1
  Top Layer w0.254: U3.11 116.074,78.297 117.611,79.834 118.414,79.834 119.274,80.694 121.75,80.694 123.586,82.53 123.609,82.53 124.47,83.391 124.47,83.414 126.742,85.685 126.742,87.269 131.752,92.279 D2.1 132,92.131 v1(132,91) ; D3.1 136,92.393 v1(136,94) ; v1(140,94) 140,93.045 140.566,92.479 D4.1 ; v1(144,94) 144.194,93.806 144.194,93.331 145.046,92.479 D5.1 ; v1(149,94) 149,93.051 149.03,93.021 149.03,92.802 D6.1
  Bottom Layer w0.254: v1(132,91) 134.984,93.984 135.984,93.984 v1(136,94) v1(140,94) v1(144,94) v1(149,94)
COL_2_ANODE: D7.1 D8.1 D9.1 D10.1 D11.1 U3.12 | length 51
  Top Layer w0.254: U3.12 116.724,78.026 117.921,79.222 118.594,79.222 119.528,80.157 122.157,80.157 129.934,87.934 D7.1 131.752,86.752 v1(131,86) ; D8.1 136,87.948 v1(136,90) ; v1(140,90) 140,88.984 140.143,88.841 140.143,88.357 D9.1 ; v1(145,90) 145,87.98 D10.1 ; v1(149,90) 149,88.984 149.03,88.954 149.03,88.357 D11.1
  Bottom Layer w0.254: v1(131,86) 134.984,89.984 135.984,89.984 v1(136,90) v1(140,90) v1(145,90) v1(149,90)
COL_3_ANODE: D12.1 D13.1 D14.1 D15.1 D16.1 U3.13 | length 48.8
  Top Layer w0.254: U3.13 117.392,76.747 117.392,77.861 118.106,78.575 118.916,78.575 119.844,79.503 122.576,79.503 126.435,83.362 130.042,83.362 ; v1(128.732,84.672) 130.042,83.362 ; D12.1 130.042,83.362 ; D13.1 136.033,83.409 v1(136.033,85.488) ; v1(140.34,85.548) 140.34,83.588 D14.1 ; D15.1 144.925,83.495 v1(144.925,85.571) ; v1(149.428,85.642) 149.428,83.641 D16.1
  Bottom Layer w0.254: v1(128.732,84.672) 133.037,84.672 133.853,85.488 v1(136.033,85.488) 136.063,85.518 140.311,85.518 v1(140.34,85.548) 140.352,85.56 144.913,85.56 v1(144.925,85.571) 144.96,85.606 149.393,85.606 v1(149.428,85.642)
COL_4_ANODE: D17.1 D18.1 D19.1 D20.1 D21.1 U3.17 | length 41.5
  Top Layer w0.254: U3.17 119.974,78.679 120.212,78.917 D17.1 131.581,79.034 v1(131.581,80.881) ; v1(135.967,80.916) 135.967,78.936 D18.1 ; v1(140.305,80.916) 140.305,79.017 D19.1 ; D20.1 144.937,78.935 v1(144.937,80.893) ; D21.1 149.51,79.008 v1(149.51,80.869)
  Bottom Layer w0.254: v1(131.581,80.881) 131.599,80.899 135.949,80.899 v1(135.967,80.916) v1(140.305,80.916) 140.317,80.904 144.925,80.904 v1(144.937,80.893) 144.949,80.881 149.498,80.881 v1(149.51,80.869)
CoL_5_ANODE: D22.1 D23.1 D24.1 D25.1 D26.1 U3.18 | length 36.4
  Top Layer w0.254: U3.18 120.642,76.747 120.642,77.759 121.118,78.234 127.582,78.234 131.371,74.445 D22.1 131.371,74.245 132.302,73.314 134.179,73.314 134.553,73.689 134.553,73.97 134.928,74.345 D23.1 136.79,74.345 137.021,74.114 137.021,73.545 137.251,73.314 139.508,73.314 140.439,74.245 D24.1 141.37,74.345 141.601,74.114 141.601,73.545 141.831,73.314 143.247,73.314 143.617,73.685 143.617,73.974 143.988,74.345 D25.1 144.919,74.245 145.85,73.314 147.727,73.314 148.124,73.712 148.124,73.947 148.522,74.345 D26.1
GND: C1.2 C2.2 C3.2 C4.2 C5.1 C6.2 C7.2 C8.2 C9.1 D1.1 J1.1 J1.2 J1.3 J1.4 J1.A1-B12 J1.B1-A12 P1.4 R7.1 R8.1 SW1.1 SW1.2 U1.8 U2.2 U3.1 U3.15 | length 64.4
  Top Layer w0.2: U3.1 121.924,82.942 121.993,83.011 123.41,83.011 123.989,83.59 123.989,84.41 123.41,84.989 121.985,84.989
  Top Layer w0.254: C6.2 118.128,74.151 118.128,74.745 118.674,75.291 U3.15 ; v1(163.576,68.7) 163.771,68.894 163.771,68.931 163.771,69.53 165.082,70.841 J1.A1-B12
  Top Layer w0.6: C3.2@114.695,88.124 114.695,86.38 v1(114.71,86.366) ; v1(116.211,71.767) 116.211,71.755 C7.2 ; v1(116.221,73.885) 116.221,73.914 C6.2 ; v1(116.319,69.404) 116.319,69.596 C8.2 ; v1(120,67.199) 120.017,67.216 121.903,67.216 SW1.1 SW1.2 ; C4.2 121.082,85.015 121.959,85.015 ; C5.1 121.198,87.284 122.85,87.284 v1@122.859,87.293 ; 121.985,85.015 122.859,85.889 v1@122.859,87.293 ; U1.8 124.359,98.679 v1(124.379,98.659) ; v1(122.885,87.319) v1@122.859,87.293 ; C9.1 128,70.904 cw(c128.025,70.904) v1(128.025,70.928) ; v1(154.202,75.125) 154.202,75.254 C2.2 ; U2.2 C1.2@163.068,77.47 ; D1.1 162.687,88.363 v1(164.488,88.363) ; v1@163.771,68.931 J1.1 J1.3 ; J1.B1-A12 165.357,77.47 C1.2@163.068,77.47 ; v1(167.324,83.361) 167.324,81.661 R8.1 ; v1(168.938,88.5) 169,88.5 P1.4 ; J1.4 J1.2 163.072,79.151 v1(163.072,79.052) 163.068,79.052 C1.2 C1.2@163.068,77.47
NetC9_2: C9.2 SW1.3 SW1.4 U3.4 | length 30
  Top Layer w0.254: U3.4 119.992,82.547 119.992,83.559 120.434,84 v1(123,84) ; SW1.3 125.72,67.346 126.093,67.719 C9.2 128,67.724 127.671,68.053 127.386,68.053 126.677,68.762 126.677,73 ; SW1.4 125.72,73.373 126.093,73 126.677,73 ; v1(129,73) 126.677,73
  Bottom Layer w0.254: v1(123,84) 124.984,82.016 124.984,76.745 128.729,73 v1(129,73)
NetD1_2: D1.2 R3.2 | length 1.5
  Top Layer w0.254: R3.2 D1.2
NetD2_2: D2.2 D7.2 D12.2 D17.2 D22.2 R1.2 | length 24.8
  Top Layer w0.254: D22.2 133.471,78.824 D17.2 133.564,83.328 D12.2 133.598,87.68 D7.2 D2.2 133.936,92.463 R1.2
NetD3_2: D3.2 D8.2 D13.2 D18.2 D23.2 R2.2 | length 25
  Top Layer w0.254: R2.2 137.985,98.277 137.985,92.48 D3.2 D8.2 D13.2 D18.2 137.959,78.79 D23.2
NetD4_2: D4.2 D9.2 D14.2 D19.2 D24.2 R4.2 | length 25.5
  Top Layer w0.254: R4.2 140.881,98.875 141.932,97.824 141.932,93.113 142.143,92.902 142.243,92.902 142.666,92.479 D9.2 142.539,87.807 D14.2 142.505,83.455 D19.2 142.539,78.883 D24.2
NetD5_2: D5.2 D10.2 D15.2 D20.2 D25.2 R5.2 | length 25.8
  Top Layer w0.254: R5.2 147.074,96.426 147.074,92.451 D5.2 D10.2 147.146,83.616 D15.2 D20.2 D25.2
NetD6_2: D6.2 D11.2 D16.2 D21.2 D26.2 R6.2 | length 26.7
  Top Layer w0.254: R6.2 149,99 151.553,96.447 D6.2 D11.2 D16.2 151.553,78.951 D21.2 151.553,78.883 D26.2
NetJ1_A5: J1.A5 R7.2 | length 13.4
  Top Layer w0.2: J1.A5@165.407,72.741 J1.A5 167.209,72.791 169,71 171.883,71 172,70.883 172,68 170.337,66.337 169.986,66.337 R7.2
NetJ1_B5: J1.B5 R8.2 | length 13.9
  Top Layer w0.2: J1.B5 168.696,75.791 168.696,77.59 168.813,77.707 171.009,77.707 171.216,77.914 171.216,80.388 171.009,80.595 168.813,80.595 168.696,80.712 R8.2
NetR1_1: R1.1 U1.15 | length 23.2
  Top Layer w0.254: U1.15 117.939,91.059 120.314,88.684 126.118,88.684 132.436,95.003 R1.1
NetR2_1: R2.1 U1.1 | length 21.9
  Top Layer w0.254: U1.1 125.789,89.789 131.121,95.121 131.121,100.392 131.323,100.594 134.293,100.594 135.762,99.125 R2.1
NetR4_1: R4.1 U1.2 | length 25.9
  Top Layer w0.254: U1.2 122.266,91 125.432,91 130.061,95.629 130.061,101.061 130.545,101.545 136.937,101.545 139.11,99.373 139.133,99.373 139.381,99.125 R4.1
NetR5_1: R5.1 U1.3 | length 29.7
  Top Layer w0.254: U1.3 125.329,92.329 129,96 129,101.487 130.019,102.506 139.621,102.506 142.752,99.375 142.752,99.248 R5.1
NetR6_1: R6.1 U1.4 | length 33.6
  Top Layer w0.254: U1.4 125.078,93.599 127.892,96.412 127.892,102.126 129.224,103.458 142.142,103.458 146.227,99.373 146.252,99.373 146.5,99.125 R6.1
OE~: U1.13 U3.6 | length 23.8
  Top Layer w0.254: U1.13 116.332,93.599 115.915,94.016 113.579,94.016 112.984,93.421 112.984,86.655 114.289,85.35 115.131,85.35 115.855,86.074 115.855,87.292 116.579,88.016 117.421,88.016 118.674,86.763 U3.6
RCLK: U1.12 U3.7 | length 22.1
  Top Layer w0.254: U1.12 113.714,94.869 112.476,93.631 112.476,84.466 115.844,81.098 117.604,81.098 118.006,81.499 118.006,82.511 U3.7
SER: U1.14 U3.10 | length 40.7
  Top Layer w0.254: v1(115,84) 115.194,83.806 115.672,83.806 116.074,83.404 U3.10 ; U1.14 117.972,92.329 119.365,93.722 119.365,97.45 122.368,100.454 124.546,100.454 126.049,98.951 126.049,97.324 125,96.275 v1(125,96)
  Bottom Layer w0.254: v1(115,84) 121.143,84 125,87.857 v1(125,96)
SRCLK: U1.11 U3.9 | length 17.7
  Top Layer w0.254: v1(114,96) 114.07,96.07 116.738,96.07 U1.11 ; v1(116.373,85.156) 116.373,84.881 116.724,84.53 U3.9
  Bottom Layer w0.254: v1(114,96) 114.275,96 114.696,95.579 114.836,95.579 115.016,95.4 115.016,87.547 116.373,86.19 v1(116.373,85.156)
SRCLR~: U1.10 U3.8 | length 28.8
  Top Layer w0.254: v1(114,102) 114,99.741 116.332,97.409 U1.10 ; v1(117,87) 117,86.725 117.374,86.351 117.374,85.592 117.389,85.577 117.389,84.735 117.374,84.72 U3.8
  Bottom Layer w0.254: v1(114,102) 115.851,102 118,99.851 118,88 v1(117,87)
SWCLK: P1.2 U3.20 | length 61.8
  Top Layer w0.254: U3.20 121.924,76.956 121.968,77 125.075,77 125.202,77.127 126.127,77.127 v1(126.218,77.218) ; v1(159,96) P1.2
  Bottom Layer w0.254: v1(126.218,77.218) 138.637,77.218 138.856,77 151,77 159,85 v1(159,96)
SWDIO: P1.3 U3.19 | length 61
  Top Layer w0.254: U3.19 121.292,76.711 121.292,75.699 121.992,75 127.075,75 127.202,75.127 128.127,75.127 v1(128.218,75.218) ; v1(161,92) 167.54,92 P1.3
  Bottom Layer w0.254: v1(128.218,75.218) 139.735,75.218 139.953,75 151,75 160,84 160,91 v1(161,92)
pads on no net: J1. J1.A6 J1.A7 J1.A8 J1.B6 J1.B7 J1.B8 U1.5 U1.6 U1.7 U1.9 U2.4 U3.2 U3.3 U3.14

## Polygon pours and split planes (outlines as drawn)
GND on L2 (GND) "GND_L02_P000" (solid, pour order 0): 114.54,104 ccw(c114.54,101.46) 112,101.46 112,67.54 ccw(c114.54,67.54) 114.54,65 170.46,65 ccw(c170.46,67.54) 173,67.54 173,101.46 ccw(c170.46,101.46) 170.46,104 119,104
GND on L2 (GND) "GND_L02_P001" (solid, pour order 1): 114.54,104 ccw(c114.54,101.46) 112,101.46 112,67.54 ccw(c114.54,67.54) 114.54,65 170.46,65 ccw(c170.46,67.54) 173,67.54 173,101.46 ccw(c170.46,101.46) 170.46,104 119,104
GND on L3 (GND) "GND_L03_P004" (solid, pour order 4): 114.54,104 ccw(c114.54,101.46) 112,101.46 112,67.54 ccw(c114.54,67.54) 114.54,65 170.46,65 ccw(c170.46,67.54) 173,67.54 173,101.46 ccw(c170.46,101.46) 170.46,104 169,104
GND on Top Layer "GND_L01_P012" (solid, pour order 12): 114.565,104.065 ccw(c114.565,101.525) 112.025,101.525 112.025,67.605 ccw(c114.565,67.605) 114.565,65.065 170.485,65.065 ccw(c170.485,67.605) 173.025,67.605 173.025,101.525 ccw(c170.485,101.525) 170.485,104.065 119.025,104.065

## Silkscreen, mask and mechanical layers (free items; w line width, h text height)
Top Overlay:
  text "+3.3V" at 160.451,97.918 h1.02
  text "SWCLK" at 160.28,95.52 h1.02
  text "SWDIO" at 160.366,92.864 h1.02
  text "GND" at 162.254,90.254 h1.02
  text "5x5LED" at 139.47,68.176 h1.02
  text "CG 6/10/24" at 139.47,66.288 h1.02
Mechanical 1:
  lines w0.254: 111,68 ccw(c115,68) 115,64 170,64 ; 111,68 111,101 ; 111,68 111,68 ; 111,101 cw(c115,101) 115,105 170,105 cw(c170,101) 174,101 174,68 ; 111,101 111,101 ; 170,64 ccw(c170,68) 174,68 ; 170,64 170,64 ; 174,68 174,68